# Altium PCB PCB v58 rev 1.50_2023-03-18.pcbdoc (part 1 of 2)
Units mil, origin at the board's own origin, x right, y up, seen from the top; angles counter-clockwise.
Board outline 7099.86 x 4632 mil, 2 copper layers (Top Layer, Bottom Layer); 87 components, 84 nets, 446 pads, 172 vias.
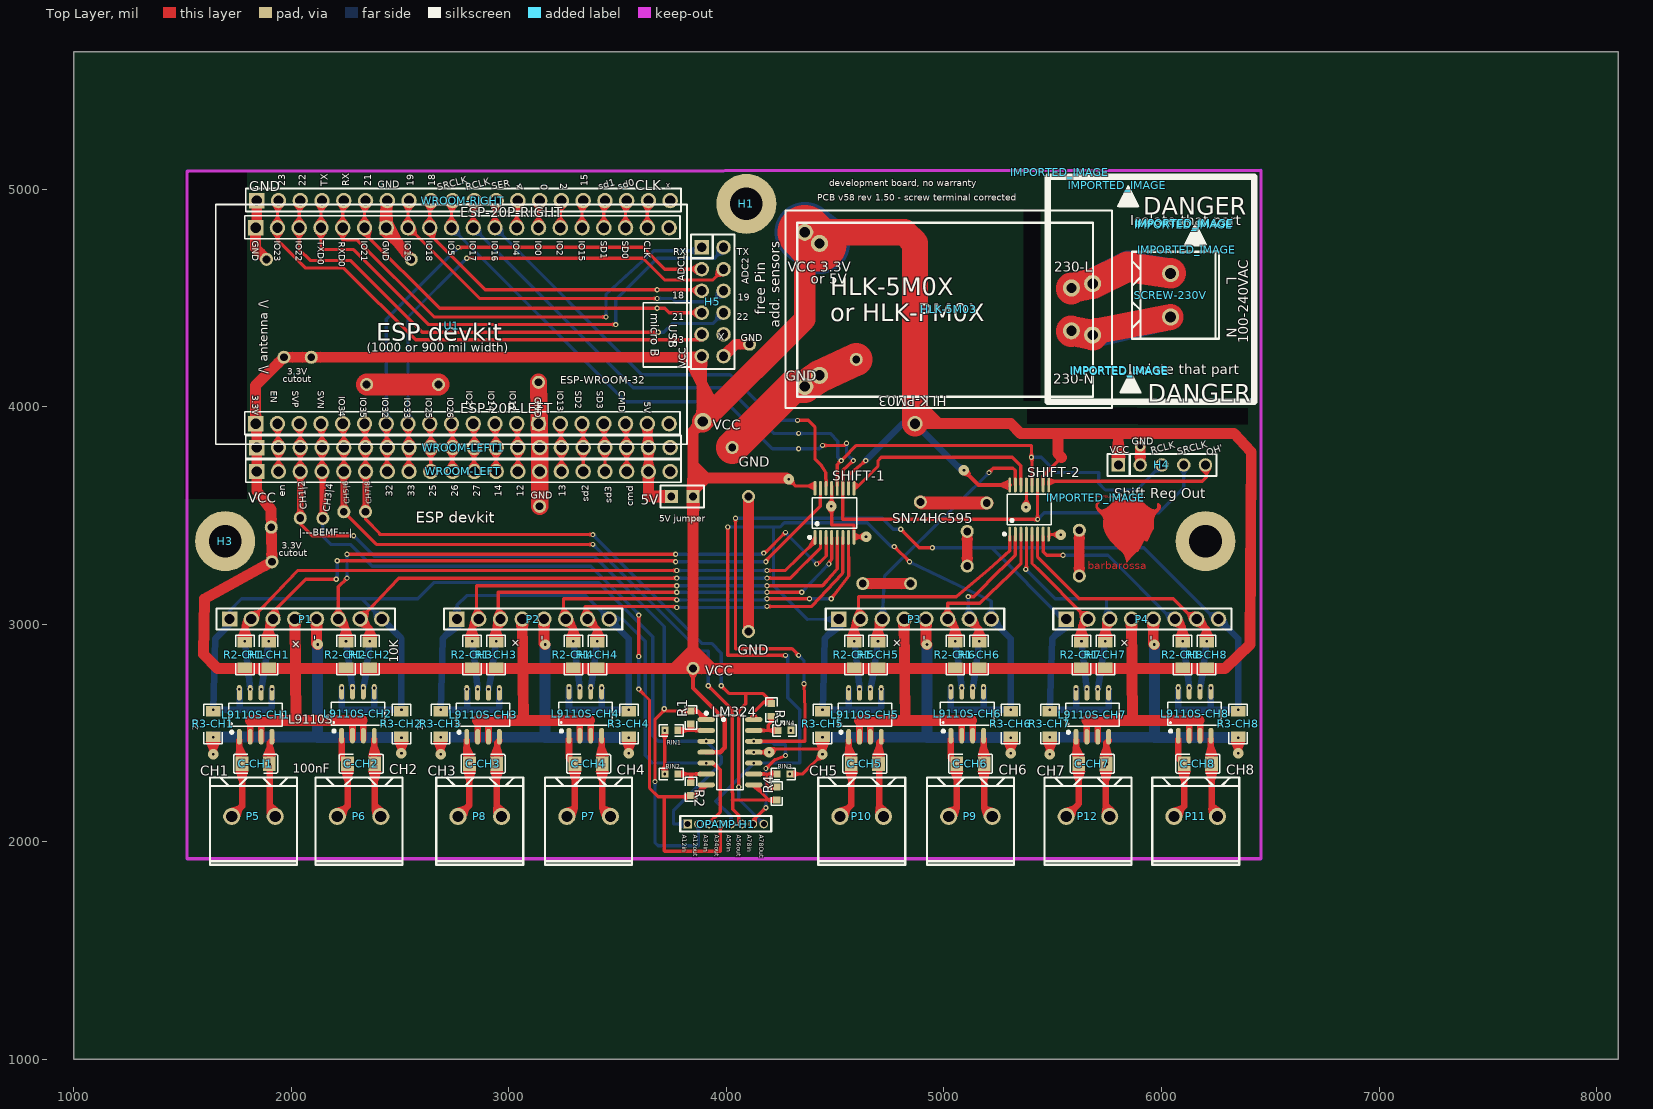
[diagram p0: Top Layer view]
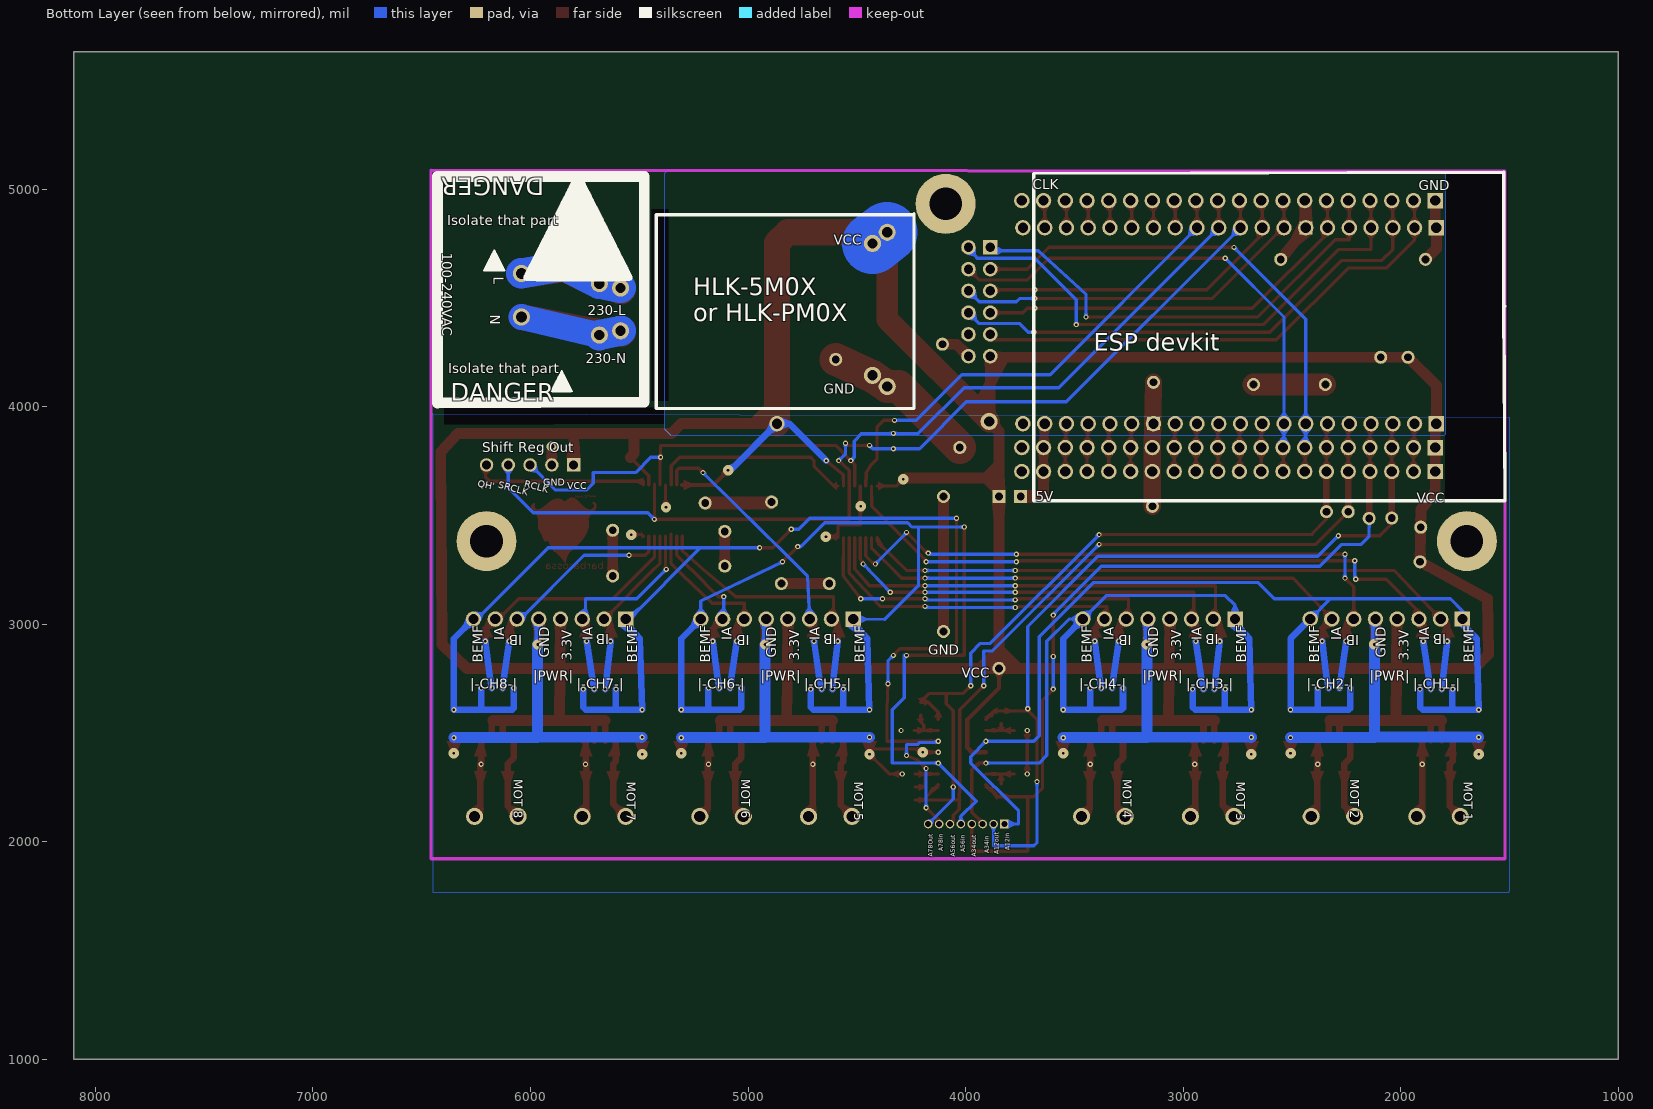
[diagram p1: Bottom Layer view, seen from below]

## Layer stack, top to bottom
Top Layer: signal copper (thickness not stored)
Dielectric: dielectric 12.6, FR-4, Dk 4.8
Bottom Layer: signal copper (thickness not stored)

## Board outline
8099.86,1000 1000,1000 1000,5632 8099.86,5632
cut-out: 5382,3997 5382,3922 6397,3917 6397,3992
cut-out: 5367,4907 5367,4027 5442,4027 5442,4907
cut-out: 1512,5082 1512,3577 1797,3577 1797,5082

## Components (designator, comment, footprint, x,y, rotation, side; value= is the part's Value field where it differs from the comment)
C-CH1 "100nF" C1206 1837,2359.02 r180 top
C-CH2 "100nF" C1206 2322,2359.02 r180 top
C-CH3 "100nF" C1206 2882,2358.9 r180 top
C-CH4 "100nF" C1206 3367,2358.9 r180 top
C-CH5 "100nF" C1206 4637,2358.9 r180 top
C-CH6 "100nF" C1206 5122,2358.9 r180 top
C-CH7 "100nF" C1206 5682,2358.9 r180 top
C-CH8 "100nF" C1206 6167,2358.9 r180 top
ESP-20P-LEFT "220S-1*20P H=8.5MM Ytype Gold-plated" HDR-TH_20P-P2.54-V-F 2787,3922 r0 top
ESP-20P-RIGHT "220S-1*20P H=8.5MM Ytype Gold-plated" HDR-TH_20P-P2.54-V-F 2787,4822 r0 top
H1 "SCREW_HOLE_GROUND" SCREW_HOLE_GROUND 4092,4932 r0 top
H3 "SCREW_HOLE_GROUND" SCREW_HOLE_GROUND 1697,3382 r0 top
H4 "Header-Female-2.54_1x5" HDR-TH_5P-P2.54-V-F 6002,3732 r0 top
H5 "X6521WV-2×06H-C30D60" HDR-TH_12P-P2.54-V-M-R2-C6-S2.54 3937,4482 r270 top
HLK-5M03 "HLK-5M03" PWRM-TH_HLK-5M03 5021.98,4447.03 r180 top
HLK-PM03 "HLK-PM03" PWRM-TH_HLK-PM03 5007,4447 r180 top
IMPORTED_IMAGE "IMPORTED_IMAGE" IMPORTED_IMAGE#1 5532.63,5076.7 r0 top
IMPORTED_IMAGE "IMPORTED_IMAGE" IMPORTED_IMAGE#1 5806.66,4167 r0 top
IMPORTED_IMAGE "IMPORTED_IMAGE" IMPORTED_IMAGE#1 6116.66,4722 r0 top
IMPORTED_IMAGE "IMPORTED_IMAGE" IMPORTED_IMAGE#2 5697.22,3581.29 r0 top
IMPORTED_IMAGE "IMPORTED_IMAGE" IMPORTED_IMAGE#1 6107.02,4841.94 r0 top
IMPORTED_IMAGE "IMPORTED_IMAGE" IMPORTED_IMAGE#1 5807.49,4162 r0 top
IMPORTED_IMAGE "IMPORTED_IMAGE" IMPORTED_IMAGE#1 6102.49,4837 r0 top
IMPORTED_IMAGE "IMPORTED_IMAGE" IMPORTED_IMAGE#1 5796.55,5017 r0 top
L9110S-CH1 "L9110S" SOP-8_L6.1-W3.9-P1.27-LS6.0-BL-1 1837,2584.02 r0 top
L9110S-CH2 "L9110S" SOP-8_L6.1-W3.9-P1.27-LS6.0-BL-1 2307,2589.02 r0 top
L9110S-CH3 "L9110S" SOP-8_L6.1-W3.9-P1.27-LS6.0-BL-1 2882,2583.9 r0 top
L9110S-CH4 "L9110S" SOP-8_L6.1-W3.9-P1.27-LS6.0-BL-1 3352,2588.9 r0 top
L9110S-CH5 "L9110S" SOP-8_L6.1-W3.9-P1.27-LS6.0-BL-1 4637,2583.9 r0 top
L9110S-CH6 "L9110S" SOP-8_L6.1-W3.9-P1.27-LS6.0-BL-1 5107,2588.9 r0 top
L9110S-CH7 "L9110S" SOP-8_L6.1-W3.9-P1.27-LS6.0-BL-1 5682,2583.9 r0 top
L9110S-CH8 "L9110S" SOP-8_L6.1-W3.9-P1.27-LS6.0-BL-1 6152,2588.9 r0 top
LM324 "LM324MTR" SOIC-14_L8.7-W3.9-P1.27-LS6.0-BL 4017,2412 r270 top
OPAMP-H1 "1.27-1*8P母" HDR-TH_8P-P1.27-V-F 3997,2082 r0 top
P1 "Header-Female-2.54_1x8" HDR-TH_8P-P2.54-V-F-1 2067,3024.01 r0 top
P2 "Header-Female-2.54_1x8" HDR-TH_8P-P2.54-V-F-1 3112,3023.89 r0 top
P3 "Header-Female-2.54_1x8" HDR-TH_8P-P2.54-V-F-1 4867,3023.89 r0 top
P4 "Header-Female-2.54_1x8" HDR-TH_8P-P2.54-V-F-1 5912,3023.89 r0 top
P5 "screw-term-1" CONN-TH_2P-P5.00_WJ500V-5.08-2P 1827,2117 r180 top
P6 "screw-term-2" CONN-TH_2P-P5.00_WJ500V-5.08-2P 2312,2117 r180 top
P7 "screw-term-4" CONN-TH_2P-P5.00_WJ500V-5.08-2P 3367,2117 r180 top
P8 "screw-term-3" CONN-TH_2P-P5.00_WJ500V-5.08-2P 2867,2117 r180 top
P9 "screw-term-6" CONN-TH_2P-P5.00_WJ500V-5.08-2P 5122,2117 r180 top
P10 "screw-term-5" CONN-TH_2P-P5.00_WJ500V-5.08-2P 4622,2117 r180 top
P11 "screw-term-8" CONN-TH_2P-P5.00_WJ500V-5.08-2P 6157,2117 r180 top
P12 "screw-term-7" CONN-TH_2P-P5.00_WJ500V-5.08-2P 5662,2117 r180 top
R1 "50kΩ" R0603 3837,2572 r90 top
R1-CH1 "10K" R1206 1897,2859.02 r270 top
R1-CH2 "10K" R1206 2362,2859.02 r270 top
R1-CH3 "10K" R1206 2942,2858.9 r270 top
R1-CH4 "10K" R1206 3407,2858.9 r270 top
R1-CH5 "10K" R1206 4697,2858.9 r270 top
R1-CH6 "10K" R1206 5162,2858.9 r270 top
R1-CH7 "10K" R1206 5742,2858.9 r270 top
R1-CH8 "10K" R1206 6207,2858.9 r270 top
R2 "50kΩ" R0603 3837,2242 r270 top
R2-CH1 "10K" R1206 1787,2859.02 r270 top
R2-CH2 "10K" R1206 2252,2859.02 r270 top
R2-CH3 "10K" R1206 2832,2858.9 r270 top
R2-CH4 "10K" R1206 3297,2858.9 r270 top
R2-CH5 "10K" R1206 4587,2858.9 r270 top
R2-CH6 "10K" R1206 5052,2858.9 r270 top
R2-CH7 "10K" R1206 5632,2858.9 r270 top
R2-CH8 "10K" R1206 6097,2858.9 r270 top
R3-CH1 "2Ω" R1206 1642,2542 r90 top
R3-CH2 "2Ω" R1206 2507,2542 r90 top
R3-CH3 "2Ω" R1206 2687,2542 r90 top
R3-CH4 "2Ω" R1206 3552,2542 r90 top
R3-CH5 "2Ω" R1206 4442,2542 r90 top
R3-CH6 "2Ω" R1206 5307,2542 r90 top
R3-CH7 "2Ω" R1206 5487,2542 r90 top
R3-CH8 "2Ω" R1206 6352,2542 r90 top
R4 "50kΩ" R0603 4232,2222 r90 top
R5 "50kΩ" R0603 4207,2607 r270 top
RIN1 "10kΩ" R0603 3747,2512 r0 top
RIN2 "10kΩ" R0603 3747,2312 r0 top
RIN3 "10kΩ" R0603 4262,2312 r0 top
RIN4 "10kΩ" R0603 4267,2512 r0 top
SCREW-230V "screw-term-230v" CONN-TH_2P-P5.00_WJ500V-5.08-2P 6042,4512 r270 top
SHIFT-1 "SN74HC595PWR" TSSOP-16_L5.0-W4.4-P0.65-LS6.4-BL 4497,3512 r0 top
SHIFT-2 "SN74HC595PWR" TSSOP-16_L5.0-W4.4-P0.65-LS6.4-BL 5392,3527 r0 top
U1 "ESP32" "ESP32-WROOM-32 DEVELOPMENT BOARD" 2737,4372 r270 top
WROOM-LEFT "220S-1*20P H=8.5MM Ytype Gold-plated" HDR-TH_20P-P2.54-V-F 2792,3702 r0 top
WROOM-LEFT1 "220S-1*20P H=8.5MM Ytype Gold-plated" HDR-TH_20P-P2.54-V-F 2792,3812 r0 top
WROOM-RIGHT "220S-1*20P H=8.5MM Ytype Gold-plated" HDR-TH_20P-P2.54-V-F 2792,4947 r0 top
? "" ? 7402,3492 r0 top
? "" ? 3977,1681.68 r0 top

## Footprints (in the part's own frame and the unit in brackets; to place one, negate y for a bottom-side part, rotate by r counter-clockwise, add the part's x,y. Pads: shape width x height; smd on the part's side, far side on the other; paste and mask are expansions set on the pad)
C1206 [mm]
  rect 1.485x1.728 smd: 1(-1.593,0) 2(1.593,0)
  silkscreen extent -2.56,-1.09 2.56,1.09
CONN-TH_2P-P5.00_WJ500V-5.08-2P [mm]
  round 2 hole 1.3: 1(-2.54,0) 2(2.54,0)
  silkscreen extent -5.08,-4.52 5.08,5.64
"ESP32-WROOM-32 DEVELOPMENT BOARD" [mil]
  round 60 hole 36: 1(450,-900) 2(450,-800) 3(450,-700) 4(450,-600) 5(450,-500) 6(450,-400) 7(450,-300) 8(450,-200) 9(450,-100) 10(450,0) 11(450,100) 12(450,200) 13(450,300) 15(450,500) 16(450,600) 17(450,700) 18(450,800) 19(450,900) 21(-450,-800) 22(-450,-700) 23(-450,-600) 24(-450,-500) 25(-450,-400) 27(-450,-200) 28(-450,-100) 29(-450,0) 30(-450,100) 31(-450,200) 32(-450,300) 33(-450,400) 34(-450,500) 35(-450,600) 36(-450,700) 37(-450,800) 38(-450,900)
  rect 60x60 hole 36: 14(450,400) 20(-450,-900) 26(-450,-300)
  silkscreen extent -557,-1083 545,1098
HDR-TH_5P-P2.54-V-F [mil]
  rect 62x62 hole 40.16: 1(-200,0)
  round 62 hole 40.16: 2(-100,0) 3(0,0) 4(100,0) 5(200,0)
  silkscreen extent -250,-50 250,50
HDR-TH_8P-P1.27-V-F [mm]
  rect 1x1 hole 0.7: 1(-4.445,0)
  round 1 hole 0.7: 2(-3.175,0) 3(-1.905,0) 4(-0.635,0) 5(0.635,0) 6(1.905,0) 7(3.175,0) 8(4.445,0)
  silkscreen extent -5.31,-0.87 5.31,0.92
HDR-TH_8P-P2.54-V-F-1 [mm]
  rect 1.8x1.8 hole 1.2: 1(-8.89,0)
  round 1.8 hole 1.2: 2(-6.35,0) 3(-3.81,0) 4(-1.27,0) 5(1.27,0) 6(3.81,0) 7(6.35,0) 8(8.89,0)
  silkscreen extent -10.41,-1.22 10.41,1.22
HDR-TH_12P-P2.54-V-M-R2-C6-S2.54 [mm]
  rect 1.7x1.7 hole 1.1: 1(-6.35,-1.27)
  round 1.7 hole 1.1: 2(-6.35,1.27) 3(-3.81,-1.27) 4(-3.81,1.27) 5(-1.27,-1.27) 6(-1.27,1.27) 7(1.27,-1.27) 8(1.27,1.27) 9(3.81,-1.27) 10(3.81,1.27) 11(6.35,-1.27) 12(6.35,1.27)
  silkscreen extent -7.85,-2.54 7.85,2.54
HDR-TH_20P-P2.54-V-F [mm]
  rect 1.8x1.8 hole 1.2: 1(-24.13,0)
  round 1.8 hole 1.2: 2(-21.59,0) 3(-19.05,0) 4(-16.51,0) 5(-13.97,0) 6(-11.43,0) 7(-8.89,0) 8(-6.35,0) 9(-3.81,0) 10(-1.27,0) 11(1.27,0) 12(3.81,0) 13(6.35,0) 14(8.89,0) 15(11.43,0) 16(13.97,0) 17(16.51,0) 18(19.05,0) 19(21.59,0) 20(24.13,0)
  silkscreen extent -25.4,-1.27 25.4,1.4
IMPORTED_IMAGE#1 [mil]
IMPORTED_IMAGE#2 [mil]
  Top Layer region: 1289 vertices and 1 holes, not listed, extent -0.22,-299.29 299.78,0.71
PWRM-TH_HLK-5M03 [mm]
  round 2 hole 1.2: 1(-16.8,3) 2(-16.8,-3) 3(16.8,9) 4(16.8,-9)
  silkscreen extent -19.05,-11.56 19.05,11.5
PWRM-TH_HLK-PM03 [mm]
  round 2 hole 1.2: 1(-14.7,2.5) 2(-14.7,-2.5) 3(14.7,7.7) 4(14.7,-7.7)
  silkscreen extent -17.24,-10.12 17.3,10.2
R0603 [mil]
  rect 31.75x34.02 smd: 1(-29.66,0) 2(29.66,0)
  silkscreen extent -55,-26 55,26
R1206 [mil]
  rect 47.54x66.97 smd: 1(-58.22,0) 2(58.22,0)
  silkscreen extent -91,-42 91,42
SCREW_HOLE_GROUND [mm]
  round 7 hole 3.8: 1(0,0)
SOIC-14_L8.7-W3.9-P1.27-LS6.0-BL [mil]
  oval 22.6x80.24 smd: 1(-150,-109.02) 2(-100,-109.02) 3(-50,-109.02) 4(0,-109.02) 5(50,-109.02) 6(100,-109.02) 7(150,-109.02) 8(150,109.02) 9(100,109.02) 10(50,109.02) 11(0,109.02) 12(-50,109.02) 13(-100,109.02) 14(-150,109.02)
  silkscreen extent -185,-115 173,60
SOP-8_L6.1-W3.9-P1.27-LS6.0-BL-1 [mil]
  oval 22.38x72.2 smd: 1(-75,-101) 2(-25,-101) 3(25,-101) 4(75,-101) 5(75,101) 6(25,101) 7(-25,101) 8(-75,101)
  silkscreen extent -123,-86 123,53
TSSOP-16_L5.0-W4.4-P0.65-LS6.4-BL [mm]
  oval 0.343x1.731 smd: 1(-2.275,-2.866) 2(-1.625,-2.866) 3(-0.975,-2.866) 4(-0.325,-2.866) 5(0.325,-2.866) 6(0.975,-2.866) 7(1.625,-2.866) 8(2.275,-2.866) 9(2.275,2.866) 10(1.625,2.866) 11(0.975,2.866) 12(0.325,2.866) 13(-0.325,2.866) 14(-0.975,2.866) 15(-1.625,2.866) 16(-2.275,2.866)
  silkscreen extent -3.05,-3.02 2.58,1.77
? [mil]

## Free pads (board coordinates)
  rect 60x60 hole 36: 1(3747,3587) 1(3847,3587)
  round 275.59 hole 149.61: 1(6202,3382)
  round 70.87 hole 47.24: 2(4867,3922)
  round 60 hole 36: 6(4107,4287) 8(1887,4677) 8(2552,4677) 9(3137,4112) 10(4027,3812) 11(5197,3557) 12(4892,3562) 13(4102,2967) 13(5107,3267) 13(5622,3222) 14(4102,3587) 14(4627,3187) 14(4847,3187) 14(5107,3427) 14(5622,3432) 15(2677,4102) 16(2347,4102) 17(4597,4217) 18(3142,3542) 19(3847,2797) 21(1967,4227) 22(2092.42,4227) 23(1912,3287) 24(1908.69,3445.96) 25(2042,3488.01) 26(2145.59,3486.66) 27(2242,3517) 28(2342,3517.34)
  round 78.74 hole 47.24: 20(3892,3931.99)

## Via types
v1: diameter 24, hole 12, Top Layer to Bottom Layer, tented both sides, 152 vias
v2: diameter 48, hole 12, Top Layer to Bottom Layer, tented both sides, 19 vias
v3: diameter 48, hole 24, Top Layer to Bottom Layer, tented both sides, 1 vias

## Nets (pads, with @x,y where several pads share a name; then routed paths per layer and width w, separated by ;. In a path a pad name is that pad's centre, name@x,y a point inside that pad or via, vN(x,y) a via of type N, cw(c..) or ccw(c..) an arc to the next point about the centre after c; other vN are vias at no path point)
5V: ESP-20P-LEFT.19 pad.1@3747,3587 U1.19 WROOM-LEFT1.19 WROOM-LEFT.19 | length 440.1
  Top Layer w40: ESP-20P-LEFT.19@3637,3922 WROOM-LEFT1.19@3642,3812 WROOM-LEFT.19@3642,3702
  Top Layer w50: WROOM-LEFT.19@3642,3702 3642,3587 pad.1@3747,3587
230-L: HLK-5M03.1 HLK-PM03.1 SCREW-230V.2 | length 1044.3
  Top Layer w120: HLK-PM03.1@5585.74,4348.57 HLK-5M03.1@5683.4,4328.92 5701.5,4347 SCREW-230V.2@6042,4412
  Top Layer w140: HLK-PM03.1@5585.74,4343.57 HLK-PM03.1@5585.74,4348.57 HLK-5M03.1@5683.4,4328.92
  Bottom Layer w120: HLK-5M03.1@5683.4,4328.92 SCREW-230V.2@6042,4412
  Bottom Layer w140: HLK-PM03.1@5585.74,4348.57 HLK-5M03.1@5683.4,4328.92
230-N: HLK-5M03.2 HLK-PM03.2 SCREW-230V.1 | length 963.8
  Top Layer w140: HLK-PM03.2@5585.74,4540.42 HLK-PM03.2@5585.74,4545.42 HLK-5M03.2@5683.4,4565.14 5842,4642 SCREW-230V.1@6042,4612
  Bottom Layer w140: HLK-PM03.2@5585.74,4545.42 HLK-5M03.2@5683.4,4565.14 5847,4647 SCREW-230V.1@6042,4612
C-CH1_1: C-CH1.1 L9110S-CH1.4 P5.1 | length 363.4
  Top Layer w30: L9110S-CH1.4@1912,2465.9 1902,2455.9 v1(1902,2357.12) 1902,2142 P5.1@1927,2117
C-CH1_2: C-CH1.2 L9110S-CH1.1 P5.2 | length 373.5
  Top Layer w30: P5.2@1727,2117 1774.3,2164.3 C-CH1.2@1774.3,2359.02 ; L9110S-CH1.1@1762,2465.9 1762,2371 C-CH1.2@1774,2359
C-CH4_1: C-CH4.1 L9110S-CH4.4 P7.1 | length 374.9
  Top Layer w30: L9110S-CH4.4@3427,2470.8 v1(3427,2357) 3428.9,2358.9 C-CH4.1@3430,2358.9 ; C-CH4.1@3429.7,2358.9 3429.7,2154.3 P7.1@3467,2117
C-CH4_2: C-CH4.2 L9110S-CH4.1 P7.2 | length 380.4
  Top Layer w30: P7.2@3267,2117 3304.3,2154.3 C-CH4.2@3304.3,2358.9 ; L9110S-CH4.1@3277,2470.8 3277,2385.9 C-CH4.2@3304,2358.9
C-CH6_1: C-CH6.1 L9110S-CH6.4 P9.1 | length 374.9
  Top Layer w30: L9110S-CH6.4@5182,2470.8 v1(5182,2357) 5183.9,2358.9 C-CH6.1@5185,2358.9 ; C-CH6.1@5184.7,2358.9 5184.7,2154.3 P9.1@5222,2117
C-CH6_2: C-CH6.2 L9110S-CH6.1 P9.2 | length 380.4
  Top Layer w30: P9.2@5022,2117 5059.3,2154.3 C-CH6.2@5059.3,2358.9 ; L9110S-CH6.1@5032,2470.8 5032,2385.9 C-CH6.2@5059,2358.9
C-CH8_1: C-CH8.1 L9110S-CH8.4 P11.1 | length 370.8
  Top Layer w30: L9110S-CH8.4@6227,2470.8 v1(6227,2357) 6228.9,2358.9 C-CH8.1@6230,2358.9 ; C-CH8.1@6229.7,2358.9 6229.7,2144.3 P11.1@6257,2117
C-CH8_2: C-CH8.2 L9110S-CH8.1 P11.2 | length 384.6
  Top Layer w30: P11.2@6057,2117 6104.3,2164.3 C-CH8.2@6104.3,2358.9 ; L9110S-CH8.1@6077,2470.8 6077,2385.9 C-CH8.2@6104,2358.9
CH1-BEMF: L9110S-CH1.5 L9110S-CH1.8 L9110S-CH2.5 L9110S-CH2.8 LM324.3 OPAMP-H1.1 P1.1 P1.8 R3-CH1.2 R3-CH2.2 | length 5370.7
  Bottom Layer w15: P1.1@1717,3024.01 1717,3062 1772,3117 2324.01,3117 ; P1.8@2417,3024.01 2324.01,3117 ; OPAMP-H1.1@3822,2082 3757,2082 3757,2142 3977,2362 3977,2392 v1(3907,2462) 3687,2462 3662,2487 3662,2942 3412,3192 2657,3192 2582,3117 2324,3117
  Bottom Layer w30: P1.1@1717,3024.01 1717,2999.02 1652,2934.02 v1(1642,2607) 1899.99,2607 1912,2619.01 v1(1912,2702.12) ; v1(1762,2702.12) 1763.45,2700.67 1763.45,2607 ; v1(2232,2707.12) 2232,2614.01 2239.01,2607 v1(2507,2607) 2507,2934.01 P1.8@2417,3024.01 ; v1(2382,2707.12) 2382.2,2607.01
CH1-IA: L9110S-CH1.6 P1.3 R1-CH1.1 SHIFT-1.15 | length 3231.8
  Top Layer w15: P1.3@1917,3024.01 1917,3057 2067,3207 v1(2207,3207) ; v1(2212,3292) 3767,3292 v1(3767,3287) ; v1(4182,3287) 4182,3292 4402,3512 4432,3542 SHIFT-1.15@4433,3635.1
  Top Layer w30: v1(1897,2922.01) 1897,3004 P1.3@1917,3024.01
  Bottom Layer w15: v1(2207,3207) 2212,3212 v1(2212,3292) ; v1(3767,3287) v1(4182,3287)
  Bottom Layer w30: v1(1862,2702.12) 1872,2754.01 v1(1897,2922.01)
CH1-IB: L9110S-CH1.7 P1.2 R2-CH1.1 SHIFT-1.1 | length 3372.8
  Top Layer w15: P1.2@1817,3023.89 2030.1,3247 v1(3772,3247) ; 4302,3277 SHIFT-1.1@4407.4,3382.4 ; 4310.6,3285.6 SHIFT-1.1@4407.4,3382.4 ; 4270.9,3247 4300.9,3277 4270.9,3247 ; 4270.9,3247 v1(4187,3247) 4270.9,3247 ; SHIFT-1.1@4407.4,3382.4 4407.4,3398.9 SHIFT-1.1@4407.4,3382.4
  Top Layer w30: v1(1787,2922.01) 1787,2994 P1.2@1817,3024.01
  Bottom Layer w15: v1(3772,3247) v1(4187,3247)
  Bottom Layer w30: v1(1787,2922.01) 1807,2744.01 v1(1812,2702.12)
CH1_2-BEMF: ESP-20P-LEFT.3 LM324.1 OPAMP-H1.2 pad.25 R1.2 U1.3 WROOM-LEFT1.3 WROOM-LEFT.3 | length 3863.2
  Top Layer w15: ESP-20P-LEFT.3@2037,3922 2042,3917 WROOM-LEFT1.3@2042,3812 WROOM-LEFT.3@2042,3702 ; pad.25@2042,3488.01 2042,3462 2097,3407 v1(2287,3407) ; v1(3672,2277) 3672,2562 3714.44,2604.44 v1(3714.44,2612) ; v1@3712,2612 3722.34,2601.66 R1.2@3837,2601.66 3868.32,2601.66 LM324.1@3907.98,2562
  Top Layer w30: pad.25@2042,3488.01 WROOM-LEFT.3@2042,3702
  Bottom Layer w15: v1(2287,3407) 2382,3312 3392,3312 3714.4,2989.6 v1(3714.44,2612) ; v1(3672,2277) 3672,1997 3687,1982 3872,1982 OPAMP-H1.2@3872,2082
CH2-IA: L9110S-CH2.6 P1.7 R1-CH2.1 SHIFT-1.2 | length 2744.8
  Top Layer w15: P1.7@2317,3024.01 2495.1,3212 v1(3772,3212) ; v1(4187,3212) 4293.4,3212 4358.4,3277 4433,3351.6 ; 4367,3285.6 4433,3351.6 ; SHIFT-1.2@4433,3398.9 4433,3351.6 ; 4433,3351.6 4433,3357.5 4433,3351.6
  Top Layer w30: P1.7@2317,3024.01 2362,2979 v1(2362,2922.01)
  Bottom Layer w15: v1(3772,3212) v1(4187,3212)
  Bottom Layer w30: v1(2332,2707.12) 2342,2764.01 v1(2362,2922.01)
CH2-IB: L9110S-CH2.7 P1.6 R2-CH2.1 SHIFT-1.3 | length 3052.8
  Top Layer w15: P1.6@2217,3024.01 2217,3172 v1(2257,3212) ; v1(2257,3322) v1(3767,3322) ; v1(4172,3327) 4177,3327 v1(4272,3422) ; v1(4414.86,3277) 4422,3277 4458.6,3313.6 SHIFT-1.3@4458.6,3398.9
  Top Layer w30: P1.6@2217,3024.01 2252,2989 v1(2252,2922.01)
  Bottom Layer w15: v1(2257,3212) v1(2257,3322) ; v1(3767,3322) 4167,3322 v1(4172,3327) ; v1(4272,3422) 4272,3419.86 v1(4414.86,3277)
  Bottom Layer w30: v1(2252,2922.01) 2277,2749.01 v1(2282,2707.12)
CH3-4-BEMF: LM324.7 OPAMP-H1.4 R2.2 | length 859.7
  Top Layer w15: 3702,2207 R2.2@3837,2207.3 ; 3714.44,2207 3714.44,1959.56 3717,1957 3972,1957 OPAMP-H1.4@3972,2082 ; R2.2@3837,2207.34 3853.32,2207.34 LM324.7@3907.98,2262
CH3-IA: L9110S-CH3.6 P2.3 R1-CH3.1 SHIFT-1.4 | length 2156.9
  Top Layer w15: P2.3@2952,3023.92 2952,3147 v1(3772,3147) ; v1(4187,3147) v1(4347,3147) ; v1(4471.29,3277) 4471.3,3281.3 4482,3297 4484.2,3299.8 SHIFT-1.4@4484.2,3398.9
  Top Layer w30: v1(2942,2921.89) 2942,3003.9 P2.3@2962,3023.89
  Bottom Layer w15: v1(3772,3147) v1(4187,3147) ; v1(4347,3147) v1(4471.29,3277)
  Bottom Layer w30: v1(2907,2702) 2917,2753.89 v1(2942,2921.89)
CH3-IB: L9110S-CH3.7 P2.2 R2-CH3.1 SHIFT-1.5 | length 2326.4
  Top Layer w15: P2.2@2852,3023.92 2852,3177 v1(3772,3177) ; v1(4187,3177) 4442,3177 4507,3252 4509.8,3254.8 SHIFT-1.5@4509.8,3399.18
  Top Layer w30: v1(2832,2921.89) 2832,2993.9 P2.2@2862,3023.89
  Bottom Layer w15: v1(3772,3177) v1(4187,3177)
  Bottom Layer w30: v1(2832,2921.89) v1(2857,2702)
CH3_4_OPAMP_IN: L9110S-CH3.5 L9110S-CH3.8 L9110S-CH4.5 L9110S-CH4.8 LM324.5 OPAMP-H1.3 P2.1 P2.8 R3-CH3.2 R3-CH4.2 | length 4023.7
  Top Layer w15: LM324.5@3907.98,2362 3942,2362 3972,2332 3972,2137 3922,2087 OPAMP-H1.3@3922,2082
  Bottom Layer w15: P2.1@2762,3023.89 2762,3087 2807,3132 3353.89,3132 P2.8@3462,3023.89 3525.1,3023.9 3627,2922 3627,2397 3662,2362 v1(3907,2362)
  Bottom Layer w30: P2.1@2762,3023.89 2762,2998.9 2697,2933.9 v1(2687,2606.88) 2944.99,2606.88 2957,2618.89 v1(2957,2702) ; v1(2807,2702) 2808.45,2700.55 2808.45,2606.88 ; v1(3277,2707) 3277,2613.89 3284.01,2606.88 v1(3552,2606.88) 3552,2933.89 P2.8@3462,3023.89 ; v1(3427,2707) 3427.2,2606.89
CH4-IA: L9110S-CH4.6 P2.7 R1-CH4.1 SHIFT-1.6 | length 1811
  Top Layer w15: P2.7@3352,3023.92 3352,3082 v1@3772,3082 ; v1(4187,3082) 4392,3082 4532,3232 4535.39,3238.61 SHIFT-1.6@4535.39,3399.18
  Top Layer w30: P2.7@3362,3023.89 3407,2978.9 v1(3407,2921.89)
  Bottom Layer w15: v1(3772,3077) 4182,3077 v1(4187,3082)
  Bottom Layer w30: v1(3377,2707) 3387,2763.89 v1(3407,2921.89)
CH4-IB: L9110S-CH4.7 P2.6 R2-CH4.1 SHIFT-1.7 | length 1967.8
  Top Layer w15: P2.6@3252,3023.92 3252,3117 v1@3772,3117 ; v1(4187,3117) v1(4382,3117) ; v1(4482,3117) 4562,3222 SHIFT-1.7@4560.98,3399.18
  Top Layer w30: P2.6@3262,3023.89 3297,2988.9 v1(3297,2921.89)
  Bottom Layer w15: v1(3772,3112) 4182,3112 v1(4187,3117) ; v1(4382,3117) v1(4482,3117)
  Bottom Layer w30: v1(3297,2921.89) 3322,2748.89 v1(3327,2707)
CH5-IA: L9110S-CH5.6 P3.3 R1-CH5.1 SHIFT-2.15 | length 1415.5
  Top Layer w15: v1(5207,3697) 5227,3717 5317,3717 5327,3707 5328,3707 SHIFT-2.15@5328,3640.1
  Top Layer w30: v1(4697,2921.89) 4697,3003.9 P3.3@4717,3023.89
  Bottom Layer w15: P3.3@4712,3023.89 P3.3@4718.9,3028.9 ; P3.3@4717,3023.89 4727,3222 4797,3292 v1(5207,3697)
  Bottom Layer w30: v1(4662,2702) 4672,2753.89 v1(4697,2921.89)
CH5-IB: L9110S-CH5.7 P3.2 R2-CH5.1 SHIFT-2.1 | length 1288.6
  Top Layer w15: P3.2@4617,3023.89 4607,3023.9 4607,3127 5057,3127 5207,3252 5302.4,3337.4 SHIFT-2.1@5302.4,3403.9
  Top Layer w30: v1(4587,2921.89) 4587,2993.9 P3.2@4617,3023.89
  Bottom Layer w30: v1(4587,2921.89) v1(4612,2702)
CH5_6-BEMF: ESP-20P-LEFT.5 LM324.8 OPAMP-H1.6 pad.27 R4.1 U1.5 WROOM-LEFT1.5 WROOM-LEFT.5 | length 3546.2
  Top Layer w15: ESP-20P-LEFT.5@2237,3922 2242,3917 WROOM-LEFT1.5@2242,3812 WROOM-LEFT.5@2242,3702 ; pad.27@2242,3517 2392,3367 v1(3387,3367) ; v1(3917,2717) 4027,2607 4027,2227 4029.44,2224.56 4029.44,2192 4029.44,2149.56 4057,2122 4057,2097 OPAMP-H1.6@4072,2082 ; 4027,2192 R4.1@4232,2192 ; LM324.8@4126.02,2262 4195.68,2192.34 R4.1@4232,2192.34
  Top Layer w30: pad.27@2242,3517 WROOM-LEFT.5@2242,3702
  Bottom Layer w15: v1(3387,3367) 3877,2877 3917,2877 v1(3917,2717)
CH5_6_OPAMP_IN: L9110S-CH5.5 L9110S-CH5.8 L9110S-CH6.5 L9110S-CH6.8 LM324.10 OPAMP-H1.5 P3.1 P3.8 R3-CH5.2 R3-CH6.2 | length 5850.6
  Top Layer w15: v1(4007,3447) 4007,2857 v1(4272,2857) ; v1(4772,3357) v1(4842,3287)
  Bottom Layer w15: v1(4007,3447) 4192,3447 4247,3447 4267,3467 4647,3467 4757,3357 v1(4772,3357) ; OPAMP-H1.5@4022,2082 4022,2117 3952,2187 3951.02,2187 v1(4126.02,2362) 4337,2362 4337,2607 4282,2662 4282,2857 v1(4272,2857) ; 4217,3447 4217,3177 4372,3022 P3.1@4517,3023.89 ; v1(4842,3287) 5217,3107 P3.8@5217,3023.89
  Bottom Layer w30: P3.1@4517,3023.89 4517,2998.9 4452,2933.9 v1(4442,2606.88) 4699.99,2606.88 4712,2618.89 v1(4712,2702) ; v1(4562,2702) 4563.45,2700.55 4563.45,2606.88 ; v1(5032,2707) 5032,2613.89 5039.01,2606.88 v1(5307,2606.88) 5307,2933.89 P3.8@5217,3023.89 ; v1(5182,2707) 5182.2,2606.89
CH6-IA: L9110S-CH6.6 P3.7 R1-CH6.1 SHIFT-2.2 | length 825.8
  Top Layer w15: v1(5112,3127) 5137,3127 5262,3252 ; SHIFT-2.2@5328,3403.9 5328,3318 5263.4,3253.4 ; 5262,3252 5263.4,3253.4 ; 5262,3252 5263.4,3253.4
  Top Layer w30: P3.7@5117,3023.89 5162,2978.9 v1(5162,2921.89)
  Bottom Layer w15: v1(5112,3127) 5112,3028.92 P3.7@5117,3023.89
  Bottom Layer w30: v1(5132,2707) 5142,2763.89 v1(5162,2921.89)
CH6-IB: L9110S-CH6.7 P3.6 R2-CH6.1 SHIFT-2.3 | length 952
  Top Layer w15: P3.6@5017,3023.89 5017,3097 5164.9,3097 5302,3227 5353.61,3278.61 SHIFT-2.3@5353.61,3414.18
  Top Layer w30: P3.6@5017,3023.89 5052,2988.9 v1(5052,2921.89)
  Bottom Layer w30: v1(5052,2921.89) 5077,2748.89 v1(5082,2707)
CH7-IA: L9110S-CH7.6 P4.3 R1-CH7.1 SHIFT-2.4 | length 1005.8
  Top Layer w15: v1(5376.29,3252) 5379.2,3254.9 SHIFT-2.4@5379.2,3403.9
  Top Layer w30: v1(5742,2921.89) 5742,3003.9 P4.3@5762,3023.89
  Bottom Layer w15: v1(5376.29,3252) 5511.3,3117 5747,3117 P4.3@5747,3023.9
  Bottom Layer w30: v1(5707,2702) 5717,2753.89 v1(5742,2921.89)
CH7-IB: L9110S-CH7.7 P4.2 R2-CH7.1 SHIFT-2.5 | length 816.2
  Top Layer w15: SHIFT-2.5@5404.8,3403.9 5404.8,3279.2 5432.7,3252 5647,3037.7 P4.2@5647,3023.92
  Top Layer w30: v1(5632,2921.89) 5632,2993.9 P4.2@5662,3023.89
  Bottom Layer w30: v1(5632,2921.89) v1(5657,2702)
CH7_8-BEMF: ESP-20P-LEFT.6 LM324.14 OPAMP-H1.8 pad.28 R5.1 U1.6 WROOM-LEFT1.6 WROOM-LEFT.6 | length 3538.4
  Top Layer w15: ESP-20P-LEFT.6@2337,3922 2342,3917 WROOM-LEFT1.6@2342,3812 WROOM-LEFT.6@2342,3702 ; pad.28@2342,3517.34 2342,3482 2407,3417 2407,3412 v1(3387,3412) ; v1(3977,2717) 4012,2682 4089.44,2682 4089.44,2634.44 4057,2602 v1(4057,2252) ; 4092,2682 4166.66,2682 4207,2641.66 4171.66,2641.66 4126.02,2596.02 LM324.14@4126.02,2562
  Top Layer w30: pad.28@2342,3517.34 WROOM-LEFT.6@2342,3702
  Bottom Layer w15: v1(3387,3412) 3887,2912 3932,2912 3977,2867 v1(3977,2717) ; v1(4057,2252) 4057,2197 OPAMP-H1.8@4172,2082
CH7_8_OPAMP_IN: L9110S-CH7.5 L9110S-CH7.8 L9110S-CH8.5 L9110S-CH8.8 LM324.12 OPAMP-H1.7 P4.1 P4.8 R3-CH7.2 R3-CH8.2 | length 7092.4
  Top Layer w15: v1(4042,3487) 4042,2887 4302,2887 v1(4332,2857) ; OPAMP-H1.7@4122,2082 4122,2097 v1(4182,2157) ; v1(4126,2462) 4362,2462 4362,2609.5 v1(4357,2727) ; v1(4182,2337) 4222,2377 v1(4272,2397) ; v1(4802,3437) 4887,3352 v1(4947,3352)
  Bottom Layer w15: v1(4042,3487) 4717,3487 4767,3437 v1(4802,3437) ; v1(4126,2462) 4131,2457 4212,2457 4222,2447 4272,2447 v1(4272,2397) ; v1(4182,2157) v1(4182,2337) ; v1(4332,2857) 4357,2832 v1(4357,2727) ; P4.1@5547,3023.9 5218.9,3352 v1(4947,3352) 5918.92,3352 P4.8@6247,3023.92
  Bottom Layer w30: P4.1@5562,3023.89 5562,2998.9 5497,2933.9 v1(5487,2606.88) 5744.99,2606.88 5757,2618.89 v1(5757,2702) ; v1(5607,2702) 5608.45,2700.55 5608.45,2606.88 ; v1(6077,2707) 6077,2613.89 6084.01,2606.88 v1(6352,2606.88) 6352,2933.89 P4.8@6262,3023.89 ; v1(6227,2707) 6227.2,2606.89
CH8-IA: L9110S-CH8.6 P4.7 R1-CH8.1 SHIFT-2.6 | length 1267.5
  Top Layer w15: SHIFT-2.6@5430.4,3403.9 5430.4,3308.6 5487,3252 5489.1,3249.9 5622,3117 6053.9,3117 P4.7@6147,3023.9
  Top Layer w30: P4.7@6162,3023.89 6207,2978.9 v1(6207,2921.89)
  Bottom Layer w30: v1(6177,2707) 6187,2763.89 v1(6207,2921.89)
CH8-IB: L9110S-CH8.7 P4.6 R2-CH8.1 SHIFT-2.7 | length 1123.4
  Top Layer w15: SHIFT-2.7@5456,3403.9 5456,3333 5472,3317 v1(5547,3317)
  Top Layer w30: P4.6@6062,3023.89 6097,2988.9 v1(6097,2921.89)
  Bottom Layer w15: v1(5547,3317) 5753.92,3317 P4.6@6047,3023.92
  Bottom Layer w30: v1(6097,2921.89) 6122,2748.89 v1(6127,2707)
CLK: ESP-20P-RIGHT.19 U1.38 WROOM-RIGHT.19 | length 127.1
  Top Layer w15: ESP-20P-RIGHT.19@3637,4822 3637,4942 WROOM-RIGHT.19@3642,4947
CMD: ESP-20P-LEFT.18 U1.18 WROOM-LEFT1.18 WROOM-LEFT.18 | length 220.1
  Top Layer w15: ESP-20P-LEFT.18@3537,3922 WROOM-LEFT1.18@3542,3812 WROOM-LEFT.18@3542,3702
EN: ESP-20P-LEFT.2 U1.2 WROOM-LEFT1.2 WROOM-LEFT.2 | length 220.1
  Top Layer w15: ESP-20P-LEFT.2@1937,3922 WROOM-LEFT1.2@1942,3812 WROOM-LEFT.2@1942,3702
EXT-ADC1: ESP-20P-LEFT.7 H5.3 U1.7 WROOM-LEFT1.7 WROOM-LEFT.7 | length 2503.7
  Top Layer w15: ESP-20P-LEFT.7@2437,3922 WROOM-LEFT1.7@2442,3812 2437,3707 WROOM-LEFT.7@2442,3702 ; v1(2767,4732) 3617,4732 3717,4632 H5.3@3887,4632
  Bottom Layer w15: WROOM-LEFT1.7@2437,3827 2437,4402 v1(2767,4732) ; ESP-20P-LEFT.7@2437,3922 2437,4000.33
EXT-ADC2: ESP-20P-LEFT.8 H5.4 U1.8 WROOM-LEFT1.8 WROOM-LEFT.8 | length 2509.6
  Top Layer w15: ESP-20P-LEFT.8@2537,3922 WROOM-LEFT1.8@2542,3812 2537,3707 WROOM-LEFT.8@2542,3702 ; v1(2807,4682) 3617,4682 3717,4582 3937,4582 H5.4@3987,4632
  Bottom Layer w15: WROOM-LEFT1.8@2537,3827 2537,4412 v1(2807,4682) ; ESP-20P-LEFT.8@2537,3922 2537,4000.33
EXT-IO18: ESP-20P-RIGHT.9 H5.5 U1.28 WROOM-RIGHT.9 | length 1519.8
  Top Layer w15: ESP-20P-RIGHT.9@2637,4822 2637,4942 WROOM-RIGHT.9@2642,4947 ; ESP-20P-RIGHT.9@2637,4827 2637,4792 2892,4537 v1(3682,4537) 3882,4537 H5.5@3887,4532
EXT-IO19: ESP-20P-RIGHT.8 H5.6 U1.27 WROOM-RIGHT.8 | length 1735.7
  Top Layer w15: WROOM-RIGHT.8@2542,4947 2537,4942 2537,4827 2867,4497 v1(3682,4497)
  Bottom Layer w15: v1(3682,4497) 3752,4497 3767,4482 3937,4482 H5.6@3987,4532
EXT-IO21: ESP-20P-RIGHT.6 H5.7 U1.25 WROOM-RIGHT.6 | length 1858.3
  Top Layer w15: ESP-20P-RIGHT.6@2337,4822 2337,4942 WROOM-RIGHT.6@2342,4947 ; ESP-20P-RIGHT.6@2337,4827 2337,4797 2682,4452 v1(3682,4452) 3717,4452 3737,4432 H5.7@3887,4432
EXT-IO22: ESP-20P-RIGHT.3 H5.8 U1.22 WROOM-RIGHT.3 | length 2371.8
  Top Layer w15: WROOM-RIGHT.3@2042,4947 2037,4942 2037,4827 2037,4722 2087,4672 2272,4672 2602,4342 v1(3687,4342)
  Bottom Layer w15: v1(3687,4342) 3712,4342 3752,4382 3937,4382 H5.8@3987,4432
EXT-IO23: ESP-20P-RIGHT.2 H5.9 U1.21 WROOM-RIGHT.2 | length 2345.3
  Top Layer w15: ESP-20P-RIGHT.2@1937,4814.71 1937,4942 WROOM-RIGHT.2@1942,4947 ; ESP-20P-RIGHT.2@1937,4827 1937,4767 2067,4637 2242,4637 2572,4307 3862,4307 H5.9@3887,4332
GND: ESP-20P-LEFT.14 ESP-20P-RIGHT.1 ESP-20P-RIGHT.7 H1.1 H3.1 H4.2 H5.12 HLK-5M03.3 HLK-PM03.3 LM324.11 P1.5 P2.5 P3.5 P4.5 pad.1@6202,3382 pad.6 pad.8 pad.9 pad.10 pad.11 pad.12 pad.13 pad.14 pad.15 pad.16 pad.17 pad.18 R3-CH1.1 R3-CH2.1 R3-CH3.1 R3-CH4.1 R3-CH5.1 R3-CH6.1 R3-CH7.1 R3-CH8.1 RIN1.1 RIN2.1 RIN3.2 RIN4.2 SHIFT-1.8 SHIFT-1.13 SHIFT-2.8 SHIFT-2.13 U1.14 U1.20 U1.26 WROOM-LEFT1.14 WROOM-LEFT.14 WROOM-RIGHT.1 WROOM-RIGHT.7 | length 12067.9
  Top Layer w15: v1(3717.34,2312) v1(3717.34,2512) ; v1(4126.02,2412) v2(4197,2412) 4212,2427 4442,2427 v2(4442,2402) 4352,2312 v1(4291.66,2312) ; v2(4482,3542) v2@4484.2,3544.2 ; SHIFT-1.13@4484.2,3635.1 v2@4484.2,3544.2 ; v2(4642,3402) 4589.7,3402 4586.6,3398.9 4586.6,3456.6 4484.2,3457 v2@4484.2,3544.2 ; v2(5377,3537) 5379.2,3539.2 SHIFT-2.13@5379.2,3640.1 ; SHIFT-2.8@5481.6,3403.9 5489.7,3412 v2(5537,3412)
  Top Layer w30: v2(1642,2402.12) v1(1642,2481.01) ; v2@2507,2412.1 v1(2507,2479.01) ; v2(2687,2402) v1(2687,2480.89) ; v2@3552,2412 v1(3552,2478.89) ; v2(4442,2402) v1(4442,2480.89) ; v2@5307,2412 v1(5307,2478.89) ; v2(5487,2402) v1(5487,2480.89) ; v2@6352,2412 v1(6352,2478.89)
  Top Layer w50: WROOM-RIGHT.1@1842,4947 1842,4832 1837,4827 1837,4727 pad.8@1887,4677 ; P1.5@2117,3024.01 2117,2912.12 v2(2122,2907.12) ; ESP-20P-RIGHT.7@2437,4822 pad.8@2552,4677 ; ESP-20P-RIGHT.7@2437,4827 2437,4942 WROOM-RIGHT.7@2442,4947 ; P2.5@3162,3023.89 3162,2912 v2(3167,2907) ; H5.12@3987,4232 4042,4287 pad.6@4107,4287 ; pad.13@4102,2967 pad.14@4102,3587 ; pad.14@4627,3187 pad.14@4847,3187 ; P3.5@4917,3023.89 4917,2912 v2(4922,2907) ; pad.13@5107,3267 5107,3362 pad.14@5107,3427 ; pad.13@5622,3222 pad.14@5622,3432 ; H4.2@5902,3732 v3(5902,3817) ; P4.5@5962,3023.89 5962,2912 v2(5967,2907)
  Top Layer w60: pad.12@4892,3562 4897,3557 pad.11@5197,3557
  Top Layer w80: pad.9@3137,4112 WROOM-LEFT1.14@3142,3812 WROOM-LEFT.14@3142,3702 pad.18@3142,3542
  Top Layer w100: pad.16@2347,4102 pad.15@2677,4102
  Top Layer w150: pad.10@4027,3812 4307.67,4092.67 HLK-5M03.3@4360.56,4092.7 4428.26,4138.85 pad.17@4597,4217
  Bottom Layer w30: P1.5@2117,3023.89 2122,3018.89 2122,2933.95 ; P1.5@2117,3024.01 2122,3019.01 v2(2122,2907.12) ; P2.5@3152,3023.91 P2.5@3157,3018.91 ; P2.5@3162,3023.89 3167,3018.89 v2(3167,2907) ; P3.5@4917,3023.89 4922,3018.89 v2(4922,2907) ; P4.5@5962,3023.89 5967,3018.89 v2(5967,2907)
  Bottom Layer w50: v1@1644,2479.01 v1(1642,2481.01) 2122,2481.01 v2(2122,2907.12) ; 2122,2479.01 v1(2507,2479.01) ; v1@2689,2478.89 v1(2687,2480.89) 3167,2480.89 v2(3167,2907) ; 3167,2478.89 v1(3552,2478.89) ; v1@4444,2478.89 v1(4442,2480.89) 4922,2480.89 v2(4922,2907) ; 4922,2478.89 v1(5307,2478.89) ; v1@5489,2478.89 v1(5487,2480.89) 5967,2480.89 v2(5967,2907) ; 5967,2478.89 v1(6352,2478.89)
  other v1: 4296.66,2512
  other v2: 2507,2407.12 3552,2407 5307,2407 6352,2407
H5_10: H5.10
IO0: ESP-20P-RIGHT.14 U1.33 WROOM-RIGHT.14 | length 122.1
  Top Layer w15: ESP-20P-RIGHT.14@3137,4827 3137,4942 WROOM-RIGHT.14@3142,4947
IO2: ESP-20P-RIGHT.15 U1.34 WROOM-RIGHT.15 | length 127.1
  Top Layer w15: ESP-20P-RIGHT.15@3237,4822 3237,4942 WROOM-RIGHT.15@3242,4947
IO4: ESP-20P-RIGHT.13 U1.32 WROOM-RIGHT.13 | length 127.1
  Top Layer w15: ESP-20P-RIGHT.13@3037,4822 3037,4942 WROOM-RIGHT.13@3042,4947
IO12: ESP-20P-LEFT.13 U1.13 WROOM-LEFT1.13 WROOM-LEFT.13 | length 220.1
  Top Layer w15: ESP-20P-LEFT.13@3037,3922 WROOM-LEFT1.13@3042,3812 WROOM-LEFT.13@3042,3702
IO13: ESP-20P-LEFT.15 U1.15 WROOM-LEFT1.15 WROOM-LEFT.15 | length 220.1
  Top Layer w15: ESP-20P-LEFT.15@3237,3922 WROOM-LEFT1.15@3242,3812 WROOM-LEFT.15@3242,3702
IO14: ESP-20P-LEFT.12 U1.12 WROOM-LEFT1.12 WROOM-LEFT.12 | length 220.1
  Top Layer w15: ESP-20P-LEFT.12@2937,3922 WROOM-LEFT1.12@2942,3812 WROOM-LEFT.12@2942,3702
IO15: ESP-20P-RIGHT.16 U1.35 WROOM-RIGHT.16 | length 122.1
  Top Layer w15: ESP-20P-RIGHT.16@3337,4827 3337,4942 WROOM-RIGHT.16@3342,4947
IO25: ESP-20P-LEFT.9 U1.9 WROOM-LEFT1.9 WROOM-LEFT.9 | length 494.4
  Top Layer w15: ESP-20P-LEFT.9@2637,3922 2642,3917 WROOM-LEFT1.9@2642,3812 2642,3737.8 ; WROOM-LEFT.9@2642,3702 WROOM-LEFT.9@2642,3731.6 ; WROOM-LEFT.9@2642,3702 WROOM-LEFT.9@2642,3731.6 ; WROOM-LEFT.9@2642,3702 WROOM-LEFT.9@2642,3731.6 ; WROOM-LEFT.9@2642,3702 WROOM-LEFT.9@2642,3731.6 ; WROOM-LEFT.9@2642,3731.6 2642,3737.8 ; WROOM-LEFT.9@2642,3731.6 2642,3737.8 ; 2642,3737.8 WROOM-LEFT1.9@2642,3796.9 ; 2642,3737.8 WROOM-LEFT1.9@2642,3796.9 ; 2642,3737.8 WROOM-LEFT1.9@2642,3796.9
IO26: ESP-20P-LEFT.10 U1.10 WROOM-LEFT1.10 WROOM-LEFT.10 | length 224.3
  Top Layer w15: ESP-20P-LEFT.10@2737,3922 2742,3917 WROOM-LEFT1.10@2742,3812 2737,3707 WROOM-LEFT.10@2742,3702
IO27: ESP-20P-LEFT.11 U1.11 WROOM-LEFT1.11 WROOM-LEFT.11 | length 342.7
  Top Layer w15: ESP-20P-LEFT.11@2837,3922 2842,3917 WROOM-LEFT1.11@2842,3812 2837,3707 WROOM-LEFT.11@2842,3702 ; WROOM-LEFT.11@2842,3702 WROOM-LEFT.11@2842,3731.6 ; WROOM-LEFT.11@2842,3702 WROOM-LEFT.11@2842,3731.6 ; WROOM-LEFT.11@2842,3702 WROOM-LEFT.11@2842,3731.6 ; WROOM-LEFT.11@2842,3702 WROOM-LEFT.11@2842,3731.6
LM324_2: LM324.2 R1.1 RIN1.2 | length 161.7
  Top Layer w15: RIN1.2@3776.66,2512 LM324.2@3907.98,2512 ; 3837,2512 R1.1@3837,2542.34
LM324_6: LM324.6 R2.1 RIN2.2 | length 181
  Top Layer w15: RIN2.2@3776.66,2312 LM324.6@3907.98,2312 ; R2.1@3837,2266.66 3837,2301.47 3847.53,2312
LM324_9: LM324.9 R4.2 RIN3.1 | length 208.3
  Top Layer w15: LM324.9@4126.02,2312 RIN3.1@4232.35,2312 ; 4187.27,2312 4187.27,2257 4192.61,2251.66 R4.2@4232,2251.66
LM324_13: LM324.13 R5.2 RIN4.1 | length 187.5
  Top Layer w15: LM324.13@4126.02,2512 RIN4.1@4237.35,2512 ; 4192.81,2512 4192.81,2537 4207,2551.18 R5.2@4207,2582.34
RCLK: ESP-20P-RIGHT.11 H4.3 SHIFT-1.12 SHIFT-2.12 U1.30 WROOM-RIGHT.11 | length 4242.1
  Top Layer w15: ESP-20P-RIGHT.11@2837,4822 2837,4942 WROOM-RIGHT.11@2842,4947 ; SHIFT-1.12@4509.8,3635.1 4509.8,3734.1 v1(4527.71,3752) ; 4536.3,3760.6 4597.7,3822 5402,3822 v1(5402,3767) 5404.8,3764.2 SHIFT-2.12@5404.8,3640.1
  Bottom Layer w15: ESP-20P-RIGHT.11@2837,4822 3572,4087 4007,4087 4217,3877 v1(4332,3877) 4477,3877 4512,3842 4512,3767.71 v1(4527.71,3752) ; v1(5402,3767) 5447,3767 5517,3697 5712,3697 5712,3647 5742,3617 5887,3617 H4.3@6002,3732
RJ11-CH2_1: C-CH2.2 L9110S-CH2.1 P6.2 | length 384.7
  Top Layer w30: P6.2@2212,2117 2259.3,2164.3 C-CH2.2@2259.3,2359.02 ; L9110S-CH2.1@2232,2470.9 2232,2386 C-CH2.2@2259,2359
RJ11-CH2_3: C-CH2.1 L9110S-CH2.4 P6.1 | length 370.9
  Top Layer w30: L9110S-CH2.4@2382,2470.9 v1(2382,2357.12) 2383.9,2359 C-CH2.1@2385,2359 ; C-CH2.1@2384.7,2359.02 2384.7,2144.3 P6.1@2412,2117